# Altium PCB board.PcbDoc (part 1 of 2)
Units mil, origin at the board's own origin, x right, y up, seen from the top; angles counter-clockwise.
Board outline 6805.03 x 3220.03 mil, 2 copper layers (Top Layer, Bottom Layer); 97 components, 65 nets, 363 pads, 68 vias.
Unrouted connection lines stored in the file: 1.
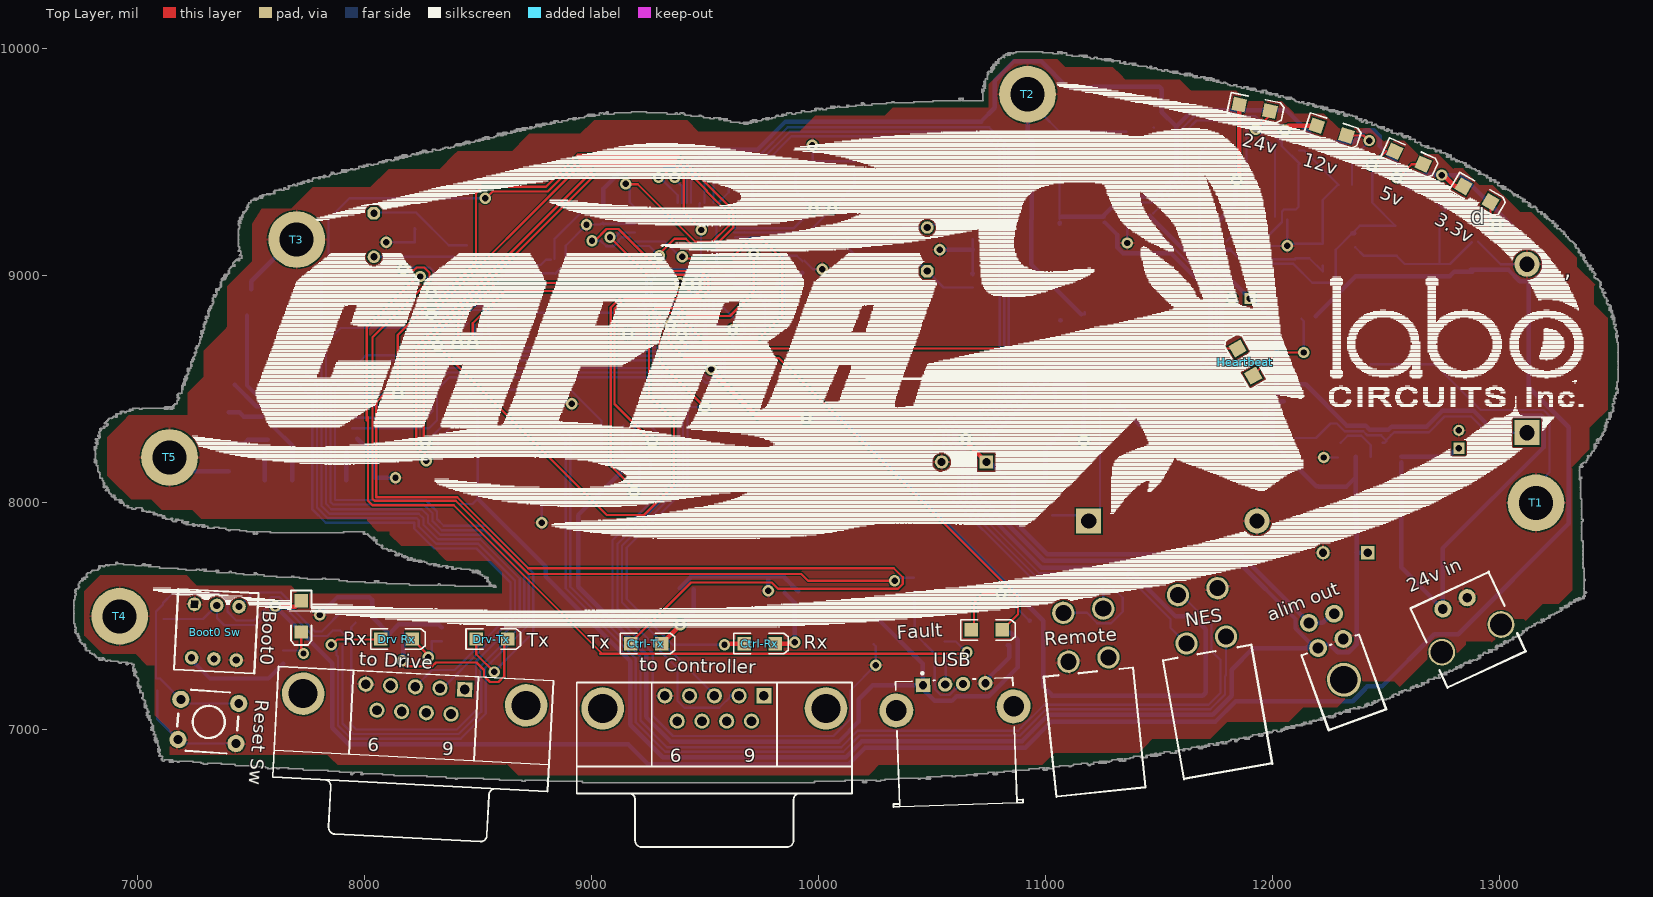
[diagram p0: Top Layer view]
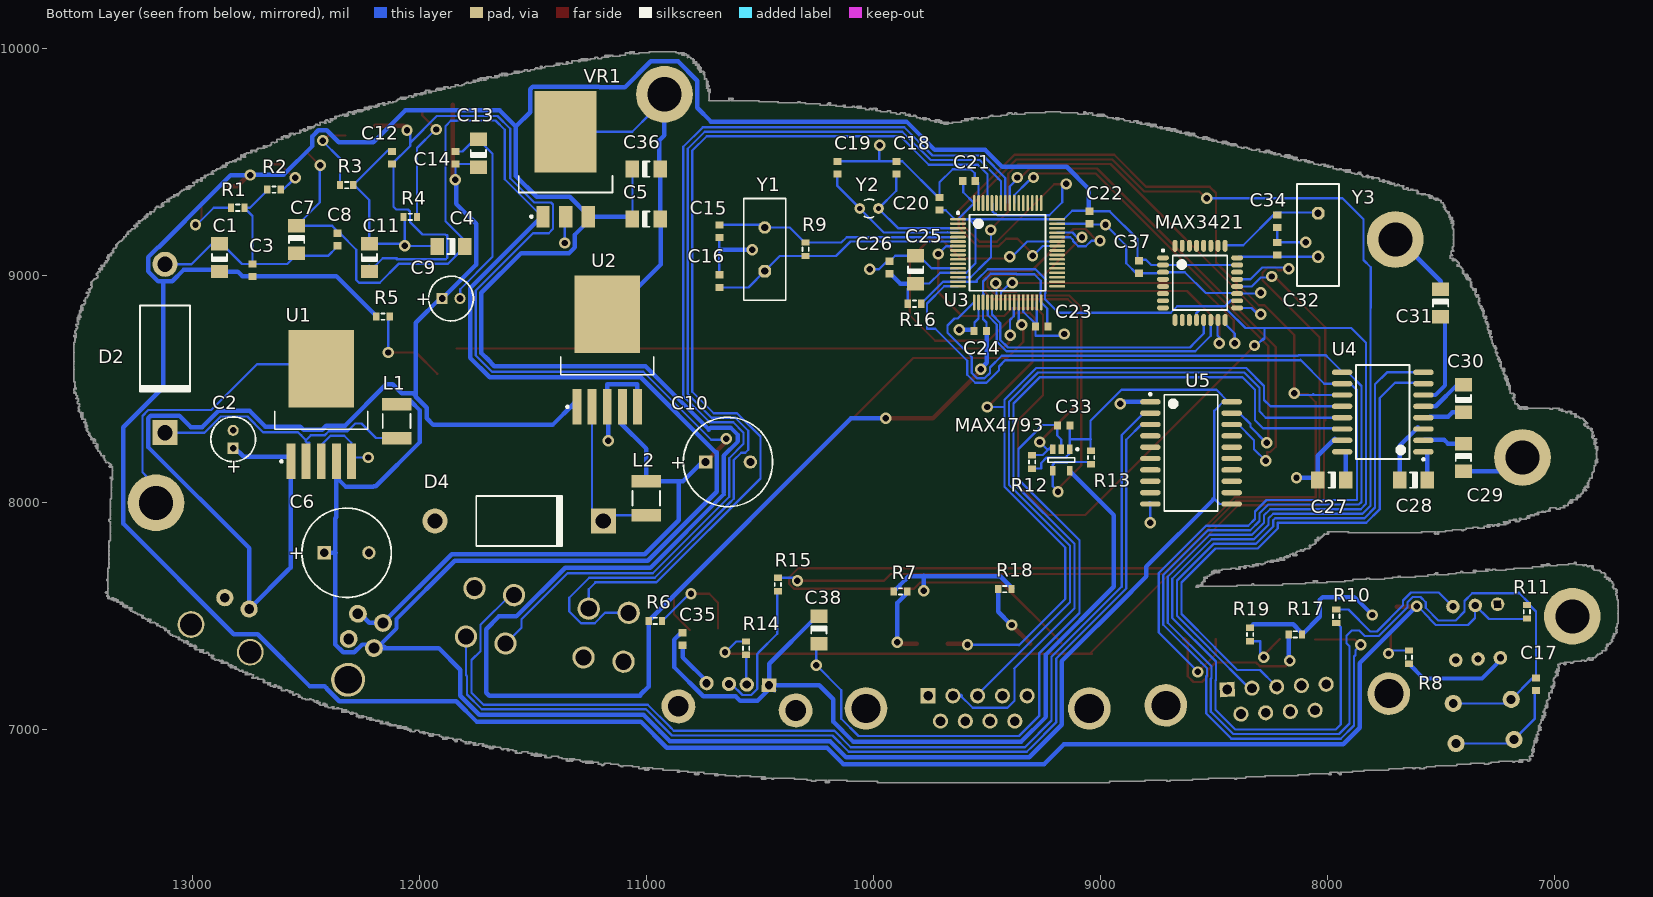
[diagram p1: Bottom Layer view, seen from below]

## Layer stack, top to bottom
Top Layer: signal copper 1.4
Dielectric: dielectric 12.6, FR-4, Dk 4.8
Bottom Layer: signal copper 1.4

## Board outline
5857 vertices, not listed, extent 6717.49,6767.49 13522.51,9987.51

## Design rules (kind name [scope] priority, off if disabled: settings)
Clearance [All] p1: gap=10
FabricationTestpoint [All] p1: side=3 testpointundercomponent=TRUE minsize=40 maxsize=100 preferedsize=60 minholesize=0 maxholesize=100 preferedholesize=32 testpointgrid=1 allowsidetop=TRUE allowsidebottom=TRUE usegrid=TRUE gridtolerance=0.01
HoleSize [All] p1: absolutevalues=TRUE maxlimit=150 minlimit=1 maxpercent=80.000 minpercent=20.000
MinimumSolderMaskSliver [All] p1: minsoldermaskwidth=6
PolygonConnect [All] p1: connectstyle=Relief reliefconductorwidth=10 reliefentries=4 polygonreliefangle="90 Angle"
RoomDefinition communication [InComponentClass('communication')] p1 off: confinementstyle=ConfineIn formatcopy=TRUE lockcomponents=FALSE outline -4110,-4270 4580,-4270 4580,-2930 -4110,-2930
RoomDefinition arm [InComponentClass('arm')] p2 off: confinementstyle=ConfineIn formatcopy=TRUE lockcomponents=FALSE outline 9495,-4420 13620,-4420 13620,-3810 9495,-3810
RoomDefinition alim [InComponentClass('alim')] p3 off: confinementstyle=ConfineIn formatcopy=TRUE lockcomponents=FALSE outline 4770,-6595 11505,-6595 11505,-5625 4770,-5625
RoutingVias [All] p1: holewidth=28 width=50 viastyle="Through Hole" minholewidth=28 minwidth=50 maxholewidth=28 maxwidth=50
SilkToSilkClearance [All] p1 off: silktosilkclearance=10
SilkscreenOverComponentPads [All] p1: minsilkscreentomaskgap=10
SolderMaskExpansion [All] p1: expansion=4
Width Width_1 [All] p1: maxlimit=19.68 minlimit=10 preferedwidth=10
Width [All] p2: maxlimit=10 minlimit=10 preferedwidth=10
23 further rules are at their usual default settings.

## Classes and differential pairs
component class communication: * C27 C28 C29 C30 C31 C32 C33 C34 C35 C37 C38 Ctrl-Rx Ctrl-Tx D10 D12 D13 D14 "Drv Rx" Drv-Tx MAX3421 MAX4793 NES P4 R7 R12 R13 R14 R15 R16 R17 R18 R19 Rx "to Controller" "to Drive" Tx U4 U5 USB Y3
component class arm: boot0 "Boot0 Sw" C15 C16 C17 C18 C19 C20 C21 C22 C23 C24 C25 C26 D7 D8 D9 Fault Heartbeat P3 R5 R6 R8 R9 R10 R11 Remote "Reset Sw" S1 S2 U3 Y1 Y2
component class alim: 3.3v 5v 12v 24v "24v in" "alim out" C1 C2 C3 C4 C5 C6 C7 C8 C9 C10 C11 C12 C13 C14 C36 D1 D2 D3 D4 D5 D6 J3-3 L1 L2 P1 R1 R2 R3 R4 T1 T2 T3 T4 T5 U1 U2 VR1

## Components (designator, comment, footprint, x,y, rotation, side; value= is the part's Value field where it differs from the comment)
3.3v "LED rouge 3.3v" 3.2X1.6X1.1 12900,9360 r330 top
5v "LED rouge 5v" 3.2X1.6X1.1 12600,9520 r336 top
12v "LED rouge 12v" 3.2X1.6X1.1 12260,9640 r342 top
24v "LED rouge 24v" 3.2X1.6X1.1 11920,9740 r348 top
"24v in" "24v" "power connector" 12740,7340 r25 top
"alim out" "Header 2X2" "5v et 12v connector" 12200,7360 r20 top
Boot0 "Boot0 led" 3.2X1.6X1.1 7720,7500 r270 top
"Boot0 Sw" "BOOT0 SW" "Switch DPDT" 7240,7320 r357 top
C1 "Cap Pol3" CAPC3216M 12880,9080 r90 bottom
C2 "Cap Pol3" CAPPR2-5x6.8 12820,8280 r90 bottom
C3 "Cap" CAPC1608L 12735,9025 r270 bottom
C4 "Cap Pol3" CAPC3216M 11860,9130 r0 bottom
C5 "Cap Pol3" CAPC3216M 11000,9250 r180 bottom
C6 "Cap Pol3" CAPPR5-10x12.5 12320.35,7780 r180 bottom
C7 "Cap Pol3" CAPC3216M 12540,9160 r270 bottom
C8 "Cap" CAPC1608L 12360,9160 r90 bottom
C9 "Cap Pol3" CAPPR2-5x6.8 11860,8900 r180 bottom
C10 "Cap Pol3" CAPPR5-10x12.5 10640,8180 r180 bottom
C11 "Cap Pol3" CAPC3216M 12220,9080 r90 bottom
C12 "Cap" CAPC1608L 12120,9520 r270 bottom
C13 "Cap Pol3" CAPC3216M 11740,9540 r90 bottom
C14 "Cap" CAPC1608L 11840,9520 r270 bottom
C15 "Cap" CAPC1608L 10678,9197 r90 bottom
C16 "Cap" CAPC1608L 10678,8977 r270 bottom
C17 "Cap" CAPC1608L 7080,7200 r90 bottom
C18 "Cap" CAPC1608L 9898,9477 r270 bottom
C19 "Cap" CAPC1608L 10158,9477 r270 bottom
C20 "Cap" CAPC1608L 9708,9317 r270 bottom
C21 "Cap" CAPC1608L 9578,9417 r0 bottom
C22 "Cap" CAPC1608L 9048,9257 r90 bottom
C23 "Cap" CAPC1608L 9258,8777 r180 bottom
C24 "Cap" CAPC1608L 9528,8757 r180 bottom
C25 "Cap Pol3" CAPC3216M 9813,9027 r90 bottom
C26 "Cap" CAPC1608L 9928,9037 r90 bottom
C27 "Cap Pol3" CAPC3216M 7980,8100 r0 bottom
C28 "Cap Pol3" CAPC3216M 7620,8100 r0 bottom
C29 "Cap Pol3" CAPC3216M 7400,8200 r270 bottom
C30 "Cap Pol3" CAPC3216M 7400,8460 r90 bottom
C31 "Cap Pol3" CAPC3216M 7500,8880 r270 bottom
C32 "Cap" CAPC1608L 8220,9120 r90 bottom
C33 "Cap" CAPC1608L 9160,8340 r180 bottom
C34 "Cap" CAPC1608L 8220,9240 r270 bottom
C35 "Cap" CAPC1608L 10840,7400 r90 bottom
C36 "Cap Pol3" CAPC3216M 11000,9470 r180 bottom
C37 "Cap" CAPC1608L 8830,9039 r270 bottom
C38 "Cap Pol3" CAPC3216M 10240,7440 r270 bottom
Ctrl-Rx "Rx" 3.2X1.6X1.1 9740,7380 r0 top
Ctrl-Tx "Tx" 3.2X1.6X1.1 9240,7380 r0 top
D2 "1n5822" DIO18.84-9.6x5.6 13120,8680 r270 bottom
D4 "1n5822" DIO18.84-9.6x5.6 11560,7920 r180 bottom
"Drv Rx" "Rx" 3.2X1.6X1.1 8140,7400 r0 top
Drv-Tx "Tx" 3.2X1.6X1.1 8560,7400 r0 top
Fault "Fault LED" 3.2X1.6X1.1 10740,7440 r0 top
Heartbeat "Heartbeat LED" 3.2X1.6X1.1 11880,8620 r120 top
L1 "Inductor" CAPC4532L 12100,8360 r90 bottom
L2 "Inductor" CAPC4532L 11000,8020 r90 bottom
MAX3421 "MAX3421E" TQFP32_L 8560,8969 r180 bottom
MAX4793 "usb current limiter" SOT95P280X145-5N 9204,8241 r270 bottom
NES "NES" "NES connector" 11620,7380 r10 top
R1 "Res1" RESC1608L 12800,9300 r0 bottom
R2 "Res1" RESC1608L 12640,9380 r180 bottom
R3 "Res1" RESC1608L 12320,9400 r0 bottom
R4 "Res1" RESC1608L 12040,9260 r180 bottom
R5 "Res1" RESC1608L 12160,8820 r0 bottom
R6 "Res1" RESC1608L 10960,7480 r0 bottom
R7 "Res1" RESC1608L 9880,7610 r180 bottom
R8 "Res1" RESC1608L 7640,7320 r90 bottom
R9 "Res1" RESC1608L 10298,9117 r270 bottom
R10 "Res1" RESC1608L 7960,7500 r270 bottom
R11 "Res1" RESC1608L 7120,7520 r270 bottom
R12 "Res1" RESC1608L 9300,8180 r270 bottom
R13 "Res1" RESC1608L 9040,8200 r90 bottom
R14 "Res1" RESC1608L 10560,7360 r270 bottom
R15 "Res1" RESC1608L 10420,7640 r270 bottom
R16 "Res1" RESC1608L 9818,8877 r0 bottom
R17 "Res1" RESC1608L 8140,7420 r0 bottom
R18 "Res1" RESC1608L 9420,7620 r0 bottom
R19 "Res1" RESC1608L 8340,7420 r270 bottom
Remote "RF Remote Receiver" "NES connector" 11100,7300 r6 top
"Reset Sw" "RESET SW" tackSwitch 7180,6960 r356 top
T1 "trou de montage" "trou de montage" 13160,8000 r0 top
T2 "trou de montage" "trou de montage" 10920,9800 r0 top
T3 "trou de montage" "trou de montage" 7700,9160 r0 top
T4 "trou de montage" "trou de montage" 6920,7500 r0 top
T5 "trou de montage" "trou de montage" 7140,8200 r0 top
"to Controller" "Controller" DSUB1.385-2H9 9540,6720 r180 top
"to Drive" "Drive" DSUB1.385-2H9 8200,6760 r177 top
U1 "LM2575HVT-5.0" TO170P1524X460-6N 12420,8360 r90 bottom
U2 "LM2575T-12" TO170P1524X460-6N 11160,8600 r90 bottom
U3 "STM32F103RBT6" LQFP64_N 9408,9102 r180 bottom
U4 "MAX3232CWE" WSO16_N 7755,8400 r0 bottom
U5 "SN74HCT573DW" DW020_N 8600,8220 r180 bottom
USB "USB SOCKET A" USB2.5-2H4B 10615,6670 r272 top
VR1 "LT1587 3.3v regulator" TO254P1435X457-4N 11355,9515 r90 bottom
Y1 "8MHz" HC-49U 10478,9117 r90 bottom
Y2 "32.768kHz" R26 10018,9297 r270 bottom
Y3 "12MHz" HC-49U 8040,9180 r270 bottom

## Footprints (in the part's own frame and the unit in brackets; to place one, negate y for a bottom-side part, rotate by r counter-clockwise, add the part's x,y. Pads: shape width x height; smd on the part's side, far side on the other; paste and mask are expansions set on the pad)
3.2X1.6X1.1 [mm] "SM LED; 2 Flat Leads"
  rect 1.5x1.5 smd: 1(-1.75,0) 2(1.75,0)
  silkscreen extent -2.9,-1.15 3.2,1.15
"5v et 12v connector" [mm]
  round 2 hole 1.2: 1(0,0) 2(0,3) 3(3,0) 4(3,3)
  round 3.8 hole 3.08: 5(1.5,-4.32)
  silkscreen extent -2.03,-9.05 4.83,-0.13
CAPC1608L [mm] "Chip Capacitor, Body 1.6x0.8mm, IPC High Density"
  rect 0.8x0.9 smd: 1(-0.7,0) 2(0.7,0)
  body extent -0.87,-0.48 0.87,0.48, height 1.3
CAPC3216M [mm] "Chip Capacitor, Body 3.2x1.6mm, IPC Low Density"
  rect 1.5x1.9 smd: 1(-1.55,0) 2(1.55,0)
  silkscreen extent -0.4,-0.85 0.4,0.85, body extent -1.7,-0.9 1.7,0.9, height 1.35
CAPC4532L [mm] "Chip Capacitor, Body 4.5x3.2mm, IPC High Density"
  rect 1.4x3.3 smd: 1(-1.9,0) 2(1.9,0)
  silkscreen extent -0.8,-1.55 0.8,1.55, body extent -2.4,-1.7 2.4,1.7, height 1.4
CAPPR2-5x6.8 [mm] "Capacitor, Electrolytic, Radial; Body 5 x 6.8 mm (Dia.xH typ); Pin Spacing 2 mm (typ)"
  rect 1.25x1.25 hole 0.75: 1(-1,0)
  round 1.25 hole 0.75: 2(1,0)
  silkscreen extent -2.5,-2.5 2.5,2.5
CAPPR5-10x12.5 [mm] "Capacitor, Electrolytic, Radial; Body 10 x 12.5 mm (Dia.xH typ); Pin Spacing 5 mm (typ)"
  rect 1.5x1.5 hole 0.9: 1(-2.5,0)
  round 1.5 hole 0.9: 2(2.5,0)
  silkscreen extent -5,-5 5,5
DIO18.84-9.6x5.6 [mm] "Diode, Axial; Body 9.5 x 5.6 mm (LxDia. max), Lead Dia. 1.32 mm (max)"
  round 2.8 hole 1.7: 1(-9.42,0)
  rect 2.8x2.8 hole 1.7: 2(9.42,0)
  silkscreen extent -4.8,-2.8 4.9,2.8
DSUB1.385-2H9 [mm] "Connector; D Subminiature; 9 Position; Right Angle; Pitch 1.385 mm"
  rect 1.69x1.69 hole 1.09: 1(-5.54,-10.92)
  round 1.69 hole 1.09: 2(-2.77,-10.92) 3(0,-10.92) 4(2.77,-10.92) 5(5.54,-10.92) 6(-4.155,-8.08) 7(-1.385,-8.08) 8(1.385,-8.08) 9(4.155,-8.08)
  round 4.76 hole 3.26: 10(-12.495,-9.5) 11(12.495,-9.5)
  silkscreen extent -15.4,-12.4 15.4,6
DW020_N [mm] "SOIC, 20-Leads, Body 12.8x7.5mm, Pitch 1.27mm, IPC Medium Density"
  oval 2.3x0.6 smd: 1(-4.55,5.715) 2(-4.55,4.445) 3(-4.55,3.175) 4(-4.55,1.905) 5(-4.55,0.635) 6(-4.55,-0.635) 7(-4.55,-1.905) 8(-4.55,-3.175) 9(-4.55,-4.445) 10(-4.55,-5.715) 11(4.55,-5.715) 12(4.55,-4.445) 13(4.55,-3.175) 14(4.55,-1.905) 15(4.55,-0.635) 16(4.55,0.635) 17(4.55,1.905) 18(4.55,3.175) 19(4.55,4.445) 20(4.55,5.715)
  silkscreen extent -4.67,-6.5 3,6.69, body extent -3.75,-6.4 3.75,6.4, height 2.65
HC-49U [mm] "Quartz Crystal, Thru-Hole; 2 Leads; Body 11.35 x 4.65 x 13.46 mm (LxWxH max)"
  oct 1.4x1.4 hole 0.8: 1(-2.44,0)
  round 1.4 hole 0.8: 2(2.44,0)
  silkscreen extent -5.7,-2.35 5.7,2.35
LQFP64_N [mm] "Thin QFP, 64-Leads, Body 10x10mm, Pitch 0.5mm, IPC Medium Density"
  oval 1.8x0.3 smd: 1(-5.55,3.75) 2(-5.55,3.25) 3(-5.55,2.75) 4(-5.55,2.25) 5(-5.55,1.75) 6(-5.55,1.25) 7(-5.55,0.75) 8(-5.55,0.25) 9(-5.55,-0.25) 10(-5.55,-0.75) 11(-5.55,-1.25) 12(-5.55,-1.75) 13(-5.55,-2.25) 14(-5.55,-2.75) 15(-5.55,-3.25) 16(-5.55,-3.75) 33(5.55,-3.75) 34(5.55,-3.25) 35(5.55,-2.75) 36(5.55,-2.25) 37(5.55,-1.75) 38(5.55,-1.25) 39(5.55,-0.75) 40(5.55,-0.25) 41(5.55,0.25) 42(5.55,0.75) 43(5.55,1.25) 44(5.55,1.75) 45(5.55,2.25) 46(5.55,2.75) 47(5.55,3.25) 48(5.55,3.75)
  oval 0.3x1.8 smd: 17(-3.75,-5.55) 18(-3.25,-5.55) 19(-2.75,-5.55) 20(-2.25,-5.55) 21(-1.75,-5.55) 22(-1.25,-5.55) 23(-0.75,-5.55) 24(-0.25,-5.55) 25(0.25,-5.55) 26(0.75,-5.55) 27(1.25,-5.55) 28(1.75,-5.55) 29(2.25,-5.55) 30(2.75,-5.55) 31(3.25,-5.55) 32(3.75,-5.55) 49(3.75,5.55) 50(3.25,5.55) 51(2.75,5.55) 52(2.25,5.55) 53(1.75,5.55) 54(1.25,5.55) 55(0.75,5.55) 56(0.25,5.55) 57(-0.25,5.55) 58(-0.75,5.55) 59(-1.25,5.55) 60(-1.75,5.55) 61(-2.25,5.55) 62(-2.75,5.55) 63(-3.25,5.55) 64(-3.75,5.55)
  silkscreen extent -5.68,-4.25 4.25,4.57, body extent -5,-5 5,5, height 1.6
"NES connector" [mm]
  round 2.5 hole 1.8: 1(0,0) 2(0,5.5) 3(4.5,0) 4(4.5,5.5)
  silkscreen extent -2.92,-14.91 7.11,-1.4
"power connector" [mm]
  round 1.924 hole 1.07: 1(2.287,4.32) 2(5.287,4.32)
  round 3 hole 2.51 paste+0: 3(0.127,0)
  round 3 hole 2.51: 4(7.447,0)
  silkscreen extent -0.96,-3.88 8.69,5.92
R26 [mm] "Crystal, Thru-Hole; 2 Leads; Body 2.1 x 6.2 mm (Dia.xH)"
  round 1.2 hole 0.6: 1(0,1.05) 2(0,-1.05)
  silkscreen extent -1.05,-0.53 1.05,0.48
RESC1608L [mm] "Chip Resistor, Body 1.6x0.8mm, IPC High Density"
  rect 0.7x0.9 smd: 1(-0.75,0) 2(0.75,0)
  silkscreen extent -0.2,-0.35 0.2,0.35, body extent -0.85,-0.48 0.85,0.48, height 0.9
SOT95P280X145-5N [mm]
  rect 1.1x0.6 smd: 1(0.127,1.785) 2(0.127,0.835) 3(0.127,-0.115) 4(2.527,-0.115) 5(2.527,1.785)
  silkscreen extent 0,-0.67 1.58,2.76, body extent 0.45,-0.66 2.2,2.33, height 1.45
"Switch DPDT" [mil]
  oval 60x59.96 hole 31.89 square: 1(-2.87,233.35)
  oval 60x59.96 hole 31.89: 2(95.55,233.35) 3(193.98,233.35) 4(-2.87,-2.87) 5(95.55,-2.87) 6(193.98,-2.87)
  silkscreen extent -78,-58 277,296
tackSwitch [mm]
  round 1.924 hole 1: 1(-0.073,-0.073) 1(6.427,-0.073) 2(-0.073,4.427) 2(6.427,4.427)
  silkscreen extent -0.25,-1.27 6.48,5.59
TO170P1524X460-6N [mm]
  rect 3.95x1 smd: 1(-4.5,3.704) 2(-4.5,2.002) 3(-4.5,0.3) 4(-4.5,-1.402) 5(-4.5,-3.104)
  rect 8.7x7.3 smd: 3(5.85,0.3)
  silkscreen extent -4.62,-4.9 1.1,5.5, body extent -0.9,-4.9 8.37,5.5, height 4.6
TO254P1435X457-4N [mm] "D2-PAK, 4-Pads, Body 9,4x10,5mm (max), IPC Medium Density"
  rect 2.4x1.5 smd: 1(-6.45,2.54) 2(-6.45,0) 3(-6.45,-2.54)
  rect 9.1x6.95 smd: 2(3.05,0)
  silkscreen extent -6.57,-5.25 -1.9,5.25, body extent -3.75,-5.28 5.65,5.28, height 4.57
TQFP32_L [mm] "Thin QFP, 32-Leads, Body 7x7mm, Pitch 0.8mm, IPC High Density"
  oval 1.35x0.55 smd: 1(-4.15,2.8) 2(-4.15,2) 3(-4.15,1.2) 4(-4.15,0.4) 5(-4.15,-0.4) 6(-4.15,-1.2) 7(-4.15,-2) 8(-4.15,-2.8) 17(4.15,-2.8) 18(4.15,-2) 19(4.15,-1.2) 20(4.15,-0.4) 21(4.15,0.4) 22(4.15,1.2) 23(4.15,2) 24(4.15,2.8)
  oval 0.55x1.35 smd: 9(-2.8,-4.15) 10(-2,-4.15) 11(-1.2,-4.15) 12(-0.4,-4.15) 13(0.4,-4.15) 14(1.2,-4.15) 15(2,-4.15) 16(2.8,-4.15) 25(2.8,4.15) 26(2,4.15) 27(1.2,4.15) 28(0.4,4.15) 29(-0.4,4.15) 30(-1.2,4.15) 31(-2,4.15) 32(-2.8,4.15)
  silkscreen extent -4.28,-3.05 3.05,3.75, body extent -3.5,-3.5 3.5,3.5, height 1.2
"trou de montage" [mil]
  round 250 hole 150: 1(0,0)
USB2.5-2H4B [mm] "Connector; USB1.1, Type A, Thru-Hole; 4 Position; Right Angle"
  rect 1.6x1.6 hole 0.92: 1(-13.49,-3.5)
  round 1.6 hole 0.92: 2(-13.49,-1) 3(-13.49,1) 4(-13.49,3.5)
  round 3.8 hole 2.3: 5(-10.78,6.57) 6(-10.78,-6.57)
  silkscreen extent -14.96,-7.25 0,7.25, body extent -14,-7.25 0,7.25, height 7.01
WSO16_N [mm] "SOIC, 16-Leads, Body 10.3x7.5mm, Pitch 1.27mm, IPC Medium Density"
  oval 2.3x0.6 smd: 1(-4.55,4.445) 2(-4.55,3.175) 3(-4.55,1.905) 4(-4.55,0.635) 5(-4.55,-0.635) 6(-4.55,-1.905) 7(-4.55,-3.175) 8(-4.55,-4.445) 9(4.55,-4.445) 10(4.55,-3.175) 11(4.55,-1.905) 12(4.55,-0.635) 13(4.55,0.635) 14(4.55,1.905) 15(4.55,3.175) 16(4.55,4.445)
  silkscreen extent -4.67,-5.25 3,5.42, body extent -3.75,-5.25 3.75,5.25, height 2.65

## Part data
3.3v 5v 12v 24v Boot0 Ctrl-Rx Ctrl-Tx "Drv Rx" Drv-Tx Fault Heartbeat: library part LED2, "Typical RED, GREEN, YELLOW, AMBER GaAs LED"
"24v in": library part "Header 2", "Header, 2-Pin"
"alim out": "Header, 2-Pin, Dual row"
"Boot0 Sw": library part "SW DPDT", "Switch"
C1 C2 C4 C5 C6 C7 C9 C10 C11 C13 C25 C27 C28 C29 C30 C31 C36 C38: "Polarized Capacitor (Surface Mount)"
C3 C8 C12 C14 C15 C16 C17 C18 C19 C20 C21 C22 C23 C24 C26 C32 C33 C34 C35 C37: "Capacitor"
D2 D4: library part "D Zener", "Zener Diode"
MAX4793: library part MAX4793
NES Remote: library part "Header 2X2", "Header, 2-Pin, Dual row"
R1 R2 R3 R4 R5 R6 R7 R8 R9 R10 R11 R12 R13 R14 R15 R16 R17 R18 R19: "Resistor"
"Reset Sw": library part SW-PB, "Switch"
"to Controller" "to Drive": library part "D Connector 9", "Receptacle Assembly, 9 Position, Right Angle"
U1 U2: "SIMPLE SWITCHER 1A Step-Down Voltage Regulator"
U3: "STM32 ARM-based 32-bit MCU with 128 Kbytes Flash, 64-pin LQFP, Industrial Temperature"
U4: "3.0V TO 5.5V, Low-Power, up to 1Mbps, True RS-232 Transceiver Using Four 0.1µF External Capacitor"
U5: "Octal Transparent D-Type Latch with 3-State Outputs"
USB: "Usb socket A"
VR1: library part "Volt Reg", "Voltage Regulator"
Y1 Y2 Y3: library part XTAL, "Crystal Oscillator"

## Via types
v1: diameter 50, hole 28, Top Layer to Bottom Layer, 68 vias

## Nets (pads, with @x,y where several pads share a name; then routed paths per layer and width w, separated by ;. In a path a pad name is that pad's centre, name@x,y a point inside that pad or via, vN(x,y) a via of type N, cw(c..) or ccw(c..) an arc to the next point about the centre after c; other vN are vias at no path point)
3.3V: 3.3v.1 "Boot0 Sw.2" Boot0.1 C1.1 C3.2 C5.1 C20.2 C21.2 C22.2 C23.2 C24.2 C25.1 C26.1 C36.1 C37.1 MAX3421.2 MAX3421.23 R5.2 R6.2 R11.2 R16.2 U3.1 U3.13 U3.19 U3.32 U3.48 U3.64 VR1.3 | length 26218.3
  Top Layer w19.68: v1@7601,7543 Boot0.1@7694.1,7543 ; v1@9517,8592 9737,8372 v1(9945,8372) ; v1@12749,9447 12801.55,9394.45 3.3v.1@12840.33,9394.45
  Bottom Layer w10: R11.2@7114,7488 7287.61,7488 7347.63,7548.03 7347.63,7535.37 ; 7345,7552 7349,7548 7349,7493 7380,7462 7522,7462 7549,7489 7549,7492 7597,7540 v1@7597,7545 ; MAX3421.23@8388.98,9042.07 8394.65,9047.74 MAX3421.23@8388.98,9053.41 ; MAX3421.23@8419.26,9047.74 8725.35,9047.74 8774.74,9047.74 8798,9071 C37.1@8820,9071 ; C37.1@8836,9075 8836,9162 8958.56,9284.56 C22.2@9048,9284.56 ; C22.2@9053,9287 9123,9287 9160.36,9249.64 U3.48@9189.5,9249.64 ; U3.48@9165.36,9249.64 U3.48@9189.5,9249.64 ; C23.2@9223.44,8784 C23.2@9230.44,8777 ; C23.2@9238,8782 9233,8782 9233,8856.13 U3.32@9260.36,8883.5 9263.14,8886.28 9263.14,8920.03 ; 9262,8977 9262,8932.71 9263.46,8931.25 9263.46,8926 ; 9262,8978 9291,9007 9368.43,9007 9370.43,9009 9482,9009 9516.27,8974.73 U3.19@9516.27,8883.5 9516.27,8810.27 9501,8795 9501,8763 C24.2@9503,8761 ; 9513.49,8920.03 9513.49,8918.51 U3.19@9517,8915 ; 9544.58,9217.58 9576.64,9249.64 ; 9549,9219 9549,9055 9590.58,9013.42 U3.13@9626.5,9013.42 ; U3.64@9555.64,9320.5 9603,9367.87 C21.2@9603,9407 ; U3.64@9558,9317 9559.14,9317 U3.1@9626.5,9249.64 ; U3.1@9607,9250 U3.1@9600,9250 ; U3.13@9638,9014 9705,9014 9753.02,8965.98 C25.1@9813,8965.98 ; U3.1@9643,9252 9680.44,9289.44 C20.2@9708,9289.44 ; C25.1@9833,8958 9847.53,8943.47 R16.2@9847.53,8877 ; C25.1@9846,8959 C25.1@9847.53,8957.47 ; C5.1@11061.02,9250 C36.1@11061.02,9453.98 ; U3.48@9189.5,9249.64 9576.64,9249.64 ; 9576.64,9249.64 9599.64,9249.64 U3.1@9600,9250 ; 9576.64,9249.64 9577,9250 U3.1@9600,9250
  Bottom Layer w19.68: v1@7609,7542 7857,7294 7857,7009 7929.71,6936.29 8390,6936.29 ; 8433.29,6936.29 8390,6936.29 ; C22.2@9050,9287 9050,9383 9148,9481 9432.58,9481 9506.43,9554.84 9728.43,9554.84 9853.43,9679.84 10715,9679.84 10775.16,9740 10775.16,9860 10860,9944.84 10980,9944.84 11094.84,9830 11205.91,9830 11209.97,9834.06 11500.03,9834.06 11511.65,9822.43 11511.65,9721.25 11574.53,9658.38 ; C24.2@9500,8768 9500,8617 v1@9528,8589 ; C25.1@9813,8965.98 9880.98,8965.98 C26.1@9928,9013 ; v1(9945,8372) 10098.03,8372 ; 10099,8372 10098.03,8372 ; 10659.37,8036.67 10981.41,7714.63 11357.37,7714.63 11572,7500 11649,7500 11705.42,7443.58 11705.42,7162.77 11692.37,7149.71 11445,7149.71 11026.29,7149.71 ; 10659.37,8047 10659.37,8207 10596,8270.37 10596,8299 10627,8330 10716.73,8330 10723.89,8322.84 11003.41,8602.37 11669.1,8602.37 11698.87,8632.13 ; 10989,7189.94 10989.53,7190.47 ; 11024,7156 10989.53,7190.47 ; C5.1@11061,9229 C5.1@11061,9234 ; C5.1@11067.06,9261.06 VR1.3@11255,9261.06 11255,9265.9 11337.25,9348.15 11482.73,9348.15 11574.53,9439.94 11574.53,9658.38 ; VR1.3@11261,9235 11314.16,9181.84 11314.16,9126.43 11340.43,9100.16 11551.58,9100.16 11726.5,8925.24 11726.5,8659.76 11698.87,8632.13 ; 11696.87,8632.13 11698.87,8632.13 ; R5.2@12190,8823 12366,8999 12780,8999 12799.98,9018.98 C1.1@12880,9018.98 ; v1(12745,9444) 12830.42,9444 13030.84,9243.57 13030.84,9242.16 13147.17,9125.83 13151.05,9125.83 13194.96,9081.92 13194.96,9019.82 13151.05,8975.91 13128,8975.91 ; v1@12748,9445 12598,9445 12470.84,9572.16 12470.84,9614.57 12444.57,9640.84 12407.43,9640.84 12354.58,9588 12202,9588 12061.16,9728.84 11644.99,9728.84 11574.53,9658.38 ; C1.1@12871,9025 12872.02,9026.02 13038.83,9026.02 13088.95,8975.91 13128,8975.91 ; 8390,6936.29 9159.81,6936.29 9247.15,6848.94 10131.93,6848.94 10203.77,6920.79 10909.19,6920.79 10967.15,6978.75 10967.15,6979.24 11024.15,7036.24 11747.63,7036.24 11837.13,7125.73 12352.87,7125.73 12408.31,7181.17 12408.31,7183 12416.31,7191 12481.84,7191 12711.85,7421.01 12817.01,7421.01 13304.84,7908.84 13304.84,8332.85 13128,8509.7 13128,8975.91 ; 10098.03,8372 10989.53,7480.5 R6.2@10989.53,7480 10989.53,7190.47
  other v1: 7606,7545 9526,8589
5V: 5v.1 "alim out.1" C4.1 C6.1 C7.1 C8.2 C33.2 L1.2 MAX4793.1 R12.2 R13.2 Remote.3 U1.4 U5.11 U5.20 VR1.1 | length 14902.6
  Top Layer w10: v1@12436,9485 12500.12,9549.12
  Bottom Layer w10: U5.11@8420.87,7995 8475,7995 8497,8017 8497,8406 U5.20@8451,8452 ; U5.20@8438,8448 8488,8498 8906.57,8498 9042.57,8362 9042.57,8280 ; 9042,8280 9042.57,8280 ; R13.2@9042.57,8234.43 9042.57,8280 ; MAX4793.1@9128,8232 9128.86,8231.14 MAX4793.1@9139.47,8220.53 ; MAX4793.1@9133.72,8236 MAX4793.1@9133.72,8242.06 ; MAX4793.1@9135.45,8217 MAX4793.1@9135.72,8216.72 ; MAX4793.1@9136,8217 MAX4793.1@9135.72,8216.72 ; MAX4793.1@9139.47,8247.81 MAX4793.1@9133.72,8242.06 ; C33.2@9140,8339 9133.72,8332.72 9133.72,8280 ; R12.2@9311.53,8151.47 9260.09,8151.47 9260.09,8175.62 9236.37,8199.35 9153.1,8199.35 9147.72,8204.72 MAX4793.1@9135.72,8216.72 ; VR1.1@11474,9276 11624,9426 11624,9644 11664,9684 11833.13,9684 11834.13,9683 11861,9683 11885,9659 11885,9241 C4.1@11796,9152 ; C4.1@11811.75,9116 11874.99,9052.76 12091.23,9052.76 12174.38,8969.61 12265.62,8969.61 12277.24,8981.23 12277.24,9115.24 C8.2@12349.56,9187.56 ; C8.2@12361,9198 12384.02,9221.02 C7.1@12540,9221.02 12438,9323.02 v1@12438,9483 ; 12364.81,7921 12364.81,7937 ; 9042.57,8280 9133.72,8280 ; MAX4793.1@9133.72,8242.06 9133.72,8280
  Bottom Layer w19.68: 8499,8015 8501,8015 8796.69,7719.32 8796.69,7675.59 8860,7612.28 8861.64,7610.64 9169.41,7302.87 9169.41,7022.06 9312.84,6878.63 10119.63,6878.63 10189.6,6948.6 10189.6,6950.48 ; 10189.5,6950.48 10896.89,6950.48 10937.47,6991.05 10937.47,6991.54 11011.85,7065.92 11735.34,7065.92 11819.32,7149.9 11819.32,7265 11914.32,7360 12200,7360 ; 10689,8222 10693.31,8222 11023.99,8552.69 11689.69,8552.69 11776.18,8639.18 11776.18,8945.82 VR1.1@11458,9264 ; 10689.06,8217.75 10689.06,8048.96 10993.7,7744.32 11844.3,7744.32 12100.39,7488.22 12100.39,7446.46 12172.85,7374 12216,7374 ; C4.1@11791,9116 C4.1@11811.75,9116 ; L1.2@12049,8447 12037,8447 11997,8407 11997,8267.62 12191.62,8073 12200,8073 12203,8070 12323,8070 U1.4@12364.81,8111.81 ; 12155,7367 12198,7367 ; 12202,7360 12216,7374 ; 12224,7374 12216,7374 ; C8.2@12349.56,9187.56 C8.2@12360,9187.56 ; U1.4@12364.81,8202.83 U1.4@12364.81,8111.81 ; 12369,7780 12370.2,7780 ; C6.1@12418.78,7780 12370.2,7780 ; 12216,7374 12217.87,7375.87 12251.77,7375.87 12286.46,7341.18 12335.51,7341.18 12370.2,7375.87 12370.2,7780 ; U1.4@12364.81,8111.81 12364.81,7937 12370.2,7931.61 12370.2,7780
  other v1: 12437,9487
12V: 12v.1 "alim out.2" "alim out.4" C10.1 C11.1 C12.2 L2.2 U2.4 | length 6932.8
  Top Layer w19.68: v1@10649,8278 10649,8269.43 C10.1@10738.43,8180 ; v1@12056,9648 12069.29,9661.29 12v.1@12194.47,9661.29
  Bottom Layer w10: v1@10646,8278 10652,8278 10714.18,8278 11013.7,8577.53 11679.39,8577.53 11751.34,8649.47 11751.34,8935.53 11498.93,9187.93 11430.14,9187.93 11410.47,9207.61 11410.47,9314.52 11419.26,9323.31 11493.02,9323.31 11599.37,9429.65 11599.37,9648.09 11655.28,9704 11922.57,9704 12039.25,9587.32 ; 11876.5,9178.73 11876.5,9079.54 11883.28,9072.76 12099.51,9072.76 ; 11878,9180 11882.88,9180 11885.28,9182.4 11985.58,9182.4 12040.75,9237.57 12040.75,9283.93 12049.53,9292.72 12101.82,9292.72 12114,9304.9 C12.2@12114,9491 ; v1@12039.25,9636.25 12039.25,9587.32 ; 12099.51,9077.6 12161.38,9077.6 C11.1@12220,9018.98 C11.1@12220,9045 ; C12.2@12120,9492.44 12039.25,9573.19 12039.25,9587.32
  Bottom Layer w19.68: v1(10648,8282) 10652,8278 v1@10659.37,8270.63 ; C10.1@10738.43,8180 C10.1@10738.43,8192.57 ; C10.1@10743,8190 10838.2,8094.8 L2.2@11000,8094.8 11000,8239 U2.4@11114,8353 ; 10857,8088 10857,7923 11006,7774 11856.59,7774 12159.6,7470.99 12220.99,7470.99 12264,7514
  other v1: 12054,9641
24V: 24v.1 "24v in.1" C2.1 C9.1 C13.1 C14.2 U1.1 U2.1 | length 5794
  Top Layer w19.68: v1@11842,9428 11852.61,9438.61 24v.1@11852.61,9754.32
  Bottom Layer w10: C13.1@11760.44,9492.44 C14.2@11840,9492.44 v1@11840,9426
  Bottom Layer w19.68: U2.1@11305.81,8422.83 11328.17,8422.83 ; U2.1@11320,8438 11320,8436 11413,8343 11938,8343 11967.32,8372.32 11967.32,8419.3 12015.2,8467.18 12015.2,8470.58 ; v1@11838,9422 11838,9317.53 11749.61,9229.13 11749.61,9049.76 C9.1@11899.37,8900 ; C9.1@11904,8905 12015.2,8793.8 12015.2,8470.58 ; U1.1@12565.81,8202.83 12773.83,8202.83 C2.1@12816,8245 ; 12567,7714.92 U1.1@12567,8178 ; 12575,7706.92 12749.73,7532.2 12749.73,7800.56 13194.96,8245.8 13194.96,8372.47 13183.34,8384.09 13056.66,8384.09 13006.54,8333.98 12956.16,8333.98 12885.29,8404.84 12746.84,8404.84 12678,8336 12523.87,8336 12509.87,8322 12427.72,8322 12409.28,8340.43 12326.58,8340.43 12145,8522.01 12117.01,8522.01 12077.2,8482.2 12026.82,8482.2 12015.2,8470.58
  other v1: 11841,9423
GND: "24v in.2" "alim out.3" "Boot0 Sw.1" "Boot0 Sw.6" "Reset Sw.1" "to Controller.5" "to Drive.5" C1.2 C2.2 C3.1 C4.2 C5.2 C6.2 C7.2 C8.1 C9.2 C10.2 C11.2 C12.1 C13.2 C14.1 C15.1 C16.1 C17.1 C18.1 C19.1 C20.1 C21.1 C22.1 C23.1 C24.1 C25.2 C26.2 C27.2 C29.2 C31.1 C32.2 C33.1 C34.2 C35.1 C36.2 C37.2 C38.2 D2.1 D4.1 MAX3421.3 MAX3421.19 MAX4793.2 NES.4 R1.1 R2.1 R3.1 R4.1 R7.1 R17.1 R18.1 R19.1 Remote.1 T1.1 T2.1 T3.1 T4.1 T5.1 U1.3 U1.5 U2.3 U2.5 U3.12 U3.18 U3.28 U3.31 U3.47 U3.63 U4.15 U5.1 U5.10 USB.4 VR1.2 | length 16046.2
  Bottom Layer w10: C17.1@7085,7173 7085,7049.27 7176.93,6957.33 ; 7188.48,6939.48 7432.21,6939.48 ; T3.1@7715,9212 T3.1@7735.44,9232.44 ; v1@8113.44,9147.56 C32.2@8220,9147.56 C34.2@8220,9203 ; C34.2@8220,9210 C34.2@8220,9203 ; C34.2@8222,9205 C34.2@8220,9203 ; v1@8289.24,8921.76 MAX3421.19@8394.65,8921.76 ; MAX3421.19@8400,8924 8535,8924 8627.24,9016.24 MAX3421.3@8725.35,9016.24 ; MAX3421.3@8742,9019.91 8750.47,9011.44 C37.2@8830,9011.44 ; U5.10@8770.1,7999.1 8779,7990.2 v1(8779,7912) ; C37.2@8838,9008 8885,9055 8885,9133 v1(8977,9225) ; v1@8978,9226 9037,9226 9040.44,9229.44 C22.1@9048,9229.44 ; C22.1@9046,9232 C22.1@9049,9235 ; C22.1@9053,9227 9055.95,9229.95 U3.47@9189.5,9229.95 ; v1@9165,8736.56 9285.56,8736.56 C23.1@9285.56,8777 9285.56,8788.56 9339,8842 U3.28@9339,8857 ; MAX4793.2@9171.13,8236 9171.13,8279.13 9189,8297 C33.1@9189,8336 ; C33.1@9194,8343 9254,8343 9360,8237 9360,8103.16 9091.47,7834.63 9091.47,7514.49 9268.01,7337.95 9268.01,7062.92 9357.77,6973.16 10064.8,6973.16 10140.63,7048.99 10140.63,7174.63 v1(10251,7285) 10251,7368 C38.2@10242,7377 ; U3.31@9280.05,8883.5 9280.05,8787.95 C23.1@9283,8785 ; U3.18@9535.95,8883.5 9535.95,8812.05 9554,8794 C24.1@9554,8765 ; U3.63@9535.95,9320.5 9535.95,9409.95 C21.1@9548,9422 ; C21.1@9553,9417 9553,9452 9571,9470 9650,9470 9708,9412 C20.1@9708,9344.56 ; U3.12@9626.5,9033.1 9743.1,9033.1 C25.2@9791,9081 ; C20.1@9713,9345 9872.56,9504.56 C18.1@9898,9504.56 ; C25.2@9833,9089 9903.56,9089 C26.2@9928,9064.56 ; C18.1@9909.56,9504.56 9974,9504.56 ; C26.2@9937,9067 9975,9029 v1(10015,9029) ; v1@9974,9569 9974,9504.56 ; C19.1@10158,9504.56 9974,9504.56 ; C16.1@10678,9002 10678,9010 10678,9115 ; 10678,9122 10678,9115 ; C15.1@10678,9162 10678,9115 ; C36.2@10935,9488 C36.2@10942,9495 ; T2.1@10979,9718 11061.92,9635.08 VR1.2@11355,9635.08 ; U2.5@11037.81,8422.83 11043,8428.02 U2.5@11043,8481 ; U2.3@11155.69,8830.31 U2.3@11171.81,8830.31 U2.3@11171.81,8839.19 ; v1(11359,9145) VR1.2@11359,9224 ; VR1.2@11476,9654 VR1.2@11477,9653 ; C13.2@11740,9601.02 11677,9538.02 11677,9084 11820,8941 C9.2@11820,8909 ; C13.2@11754,9603 11809.44,9547.56 C14.1@11840,9547.56 ; C4.2@11933,9122 C4.2@11936,9119 ; C4.2@11949,9132 v1(12064,9132) R4.1@12064,9247 ; v1@12070,9148.05 12077.02,9141.02 C11.2@12220,9141.02 12220,9334 R3.1@12285,9399 ; C12.1@12116,9552 12138.47,9552 R3.1@12290.47,9400 ; v1(12225,8200) U1.5@12286,8200 ; 12300,8265 12330.59,8295.59 12390.71,8295.59 12431.81,8254.49 U1.3@12431.81,8202.83 ; C8.1@12364,9126 12402,9088 12546,9088 12581.44,9052.56 C3.1@12735,9052.56 ; U1.3@12431.81,8610.31 12714.95,8610.31 12916.33,8408.94 13193.63,8408.94 13219.8,8382.76 13219.8,8134.85 13197,8112.05 T1.1@13197,8057 ; R2.1@12672,9374 12746,9300 R1.1@12770.47,9300 ; R1.1@12770,9299 12735,9264 C3.1@12735,9052.56 ; C1.2@12878,9149 12781.56,9052.56 C3.1@12735,9052.56 ; C1.2@12904,9150 13003.13,9050.87 D2.1@13120,9050.87 ; T1.1@13125,7955 T1.1@13125,8010
  Bottom Layer w19.68: T5.1@7150,8180 7191.02,8138.98 C29.2@7400,8138.98 ; 7181,6932 7188.48,6939.48 ; C31.1@7500,8941.02 7500,8976 T3.1@7608,9084 ; T3.1@7751,9175 T3.1@7756,9170 ; v1@7803,7508 7880,7585 8020,7585 8033,7572 8033,7497.47 R17.1@8110.47,7420 ; U4.15@7967,8282 8041.02,8207.98 8041.02,8116.98 C27.2@8044,8114 ; C27.2@8045,8110 v1(8135,8110) ; R17.1@8115,7430 8150,7465 8325,7465 R19.1@8338,7452 ; U5.10@8779,7996 U5.10@8782,7999 ; U5.1@8779.13,8445 8893,8445 v1@8906,8432 ; R18.1@9387,7624 9440,7677 9777,7677 ; C24.1@9556,8760 9559,8763 v1(9621,8763) ; 9776,7676 9777,7677 ; v1(9778,7613) 9778,7677 ; R7.1@9909.53,7610 9884.09,7635.43 9884.09,7635.94 9843.03,7677 9778,7677 ; v1@9974,9569 v1@9975,9570 ; v1(10533,9115) 10671,9115 ; 10673,9115 10678,9115 ; C16.1@10676,9010 C16.1@10678,9010 ; USB.4@10728,7208 10840,7320 C35.1@10840,7372.44 C35.1@10833.59,7372.44 ; T2.1@10920,9800 10920,9620 10942,9598 C36.2@10942,9495 ; C5.2@10936,9249 10936,9141 10936,9050 U2.3@11155.69,8830.31 ; C5.2@10938.98,9250 C36.2@10938.98,9445.02 ; U2.5@11039,8481 11039,8520 ; 11040,8523 11171.81,8523 U2.3@11171.81,8422.83 ; U2.3@11063,8804 U2.3@11066,8804 ; v1(11167,8273) U2.3@11167,8373 ; 9777,7677 9778,7677 ; 9777,7677 9778,7678 9778,7677
  other v1: 7801,7506 8912,8436 9158,8744 8293,8925 8094,9148 9972,9575
Net3.3v_2: 3.3v.2 R1.2 | length 297.8
  Top Layer w10: 3.3v.2@12959.67,9325.55 12959.67,9249.33 v1@12990,9219
  Bottom Layer w10: R1.2@12829.53,9300 12905,9300 v1@12978,9227
  other v1: 12986,9225
Net5v_2: 5v.2 R2.2 | length 222.2
  Top Layer w10: v1@12544,9423 12612.98,9491.98 5v.2@12662.94,9491.98
  Bottom Layer w10: v1@12561,9418 12599,9380 R2.2@12610.47,9380 R2.2@12601,9380
  other v1: 12547,9432
Net12v_2: 12v.2 R3.2 | length 338.2
  Top Layer w10: 12v.2@12325.53,9618.71 12400.29,9618.71 v1@12426,9593
  Bottom Layer w10: R3.2@12349.53,9400 12349.53,9517.53 v1@12427,9595
  other v1: 12426,9596
Net24v_2: 24v.2 R4.2 | length 545.7
  Top Layer w10: v1@11924,9643 v1@11926,9645 ; v1@11926,9642 11926,9643 v1@11926,9645 ; v1@11926,9664.28 v1@11926,9645 ; 24v.2@11987.39,9725.68 11987.39,9706.39 v1@11926,9645
  Bottom Layer w10: v1@11932,9642 12010.47,9563.53 R4.2@12010.47,9260
  other v1: 11925,9645
"NetBoot0 Sw_3": "Boot0 Sw.3" R10.1 | length 660.6
  Bottom Layer w10: 7448,7544 7509,7605 7630.85,7605 7666,7569.85 7666,7548.42 7780.85,7433.57 7810.57,7433.57 7906.53,7529.53 R10.1@7960,7529.53
"NetBoot0 Sw_4": "Boot0 Sw.4" R8.1 | length 473.2
  Bottom Layer w19.68: 7230,7314 7318,7226 7575.53,7226 R8.1@7640,7290.47
Netboot0_2: Boot0.2 R8.2 | length 200.6
  Top Layer w10: Boot0.2@7720,7431.1 v1@7720,7353 ; v1@7727,7345 7720,7352 v1@7720,7353 ; v1@7734,7339 7733.5,7339.5 v1@7720,7353
  Bottom Layer w10: R8.2@7640,7349.53 7715.47,7349.53 v1@7727,7338
  other v1: 7730,7336